# Altium PCB UHVValveCtrlv1.PcbDoc (part 2 of 2)
Units mm, origin at the board's own origin, x right, y up, seen from the top; angles counter-clockwise.
Board outline 139.7 x 45.72 mm, 2 copper layers (Top Layer, Bottom Layer); 66 components, 39 nets, 217 pads, 30 vias.
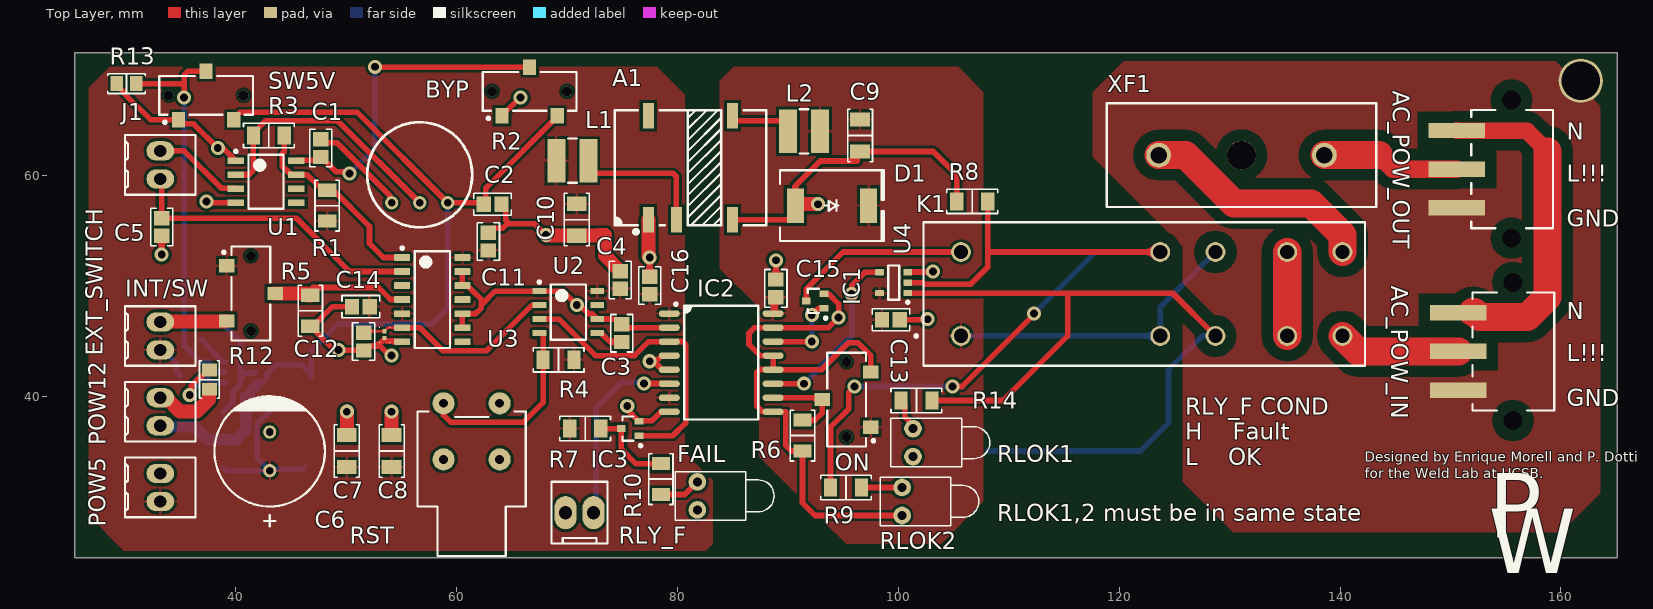
[diagram p0: Top Layer view]

## Polygon pours and split planes (outlines as drawn) (continued)
+5_OUT on Top Layer "+5_OUT_L01_P007" (solid, pour order 7): 85.09,69.85 83.82,68.58 83.82,51.562 87.376,48.006 87.376,34.544 95.25,26.67 103.886,26.67 107.696,30.48 107.696,67.564 105.41,69.85
AC_GND on Top Layer (solid, pour order 12): 160.02,27.686 130.302,27.686 125.73,32.258 125.73,53.594 117.602,61.722 117.602,67.564 120.396,70.358 159.512,70.358 163.576,66.294 163.576,31.242
+5 on Top Layer "+5_L01_P006" (solid, pour order 6): 27.305,68.58 28.575,69.85 78.105,69.85 80.645,67.31 80.645,34.925 83.185,32.385 83.185,26.67 82.55,26.035 29.845,26.035 26.67,29.21 26.67,67.945

## Other copper
Top Layer:
  region: 72.729,45.72

## Silkscreen, mask and mechanical layers (free items; w line width, h text height)
Top Overlay:
  lines w0.1: 52.959,44.918 53.015,44.918 ; 52.959,46.268 53.015,46.268 ; 53.919,44.918 53.975,44.918 ; 53.919,46.268 53.975,46.268
  text "N" at 160.528,63.246 h1.52
  text "L!!!" at 160.528,59.436 h1.52
  text "GND" at 160.528,55.372 h1.52
  text "N" at 160.528,46.99 h1.52
  text "L!!!" at 160.528,43.18 h1.52
  text "GND" at 160.528,39.116 h1.52
  text "RLY_F COND / H    Fault / L    OK" at 125.984,33.782 h1.52
  text "Designed by Enrique Morell and P. Dotti / for the Weld Lab at UCSB." at 142.24,32.258 h1.52
  text "RLOK1,2 must be in same state" at 108.966,28.702 h1.52
  text "P" at 153.48,25.306 h10
  text "W" at 153.471,22.056 h10
Bottom Overlay:
  lines w0.2: 35.262,38.608 35.262,32.468 37.362,32.468 ; 40.362,32.468 42.462,32.468 ; 40.362,39.668 42.462,39.668
Border (Mech3):
  the board outline again, w0.254
Mechanical 13:
  lines w0.1: 35.262,32.468 42.462,32.468 42.462,39.668 35.262,39.668 35.262,32.468 ; 53.302,45.278 53.302,45.908 53.632,45.908 53.632,45.278 53.302,45.278
Mechanical 15:
  lines w0.05: 35.012,31.643 42.712,31.643 42.712,40.493 35.012,40.493 35.012,31.643 ; 53.117,44.843 53.117,46.343 53.817,46.343 53.817,44.843 53.117,44.843
  lines w0.1: 38.362,36.068 39.362,36.068 ; 38.862,35.568 38.862,36.568 ; 53.302,45.593 53.632,45.593 ; 53.467,45.428 53.467,45.758